# EAGLE board PCB_INKTIME (EAGLE 9.7.0)
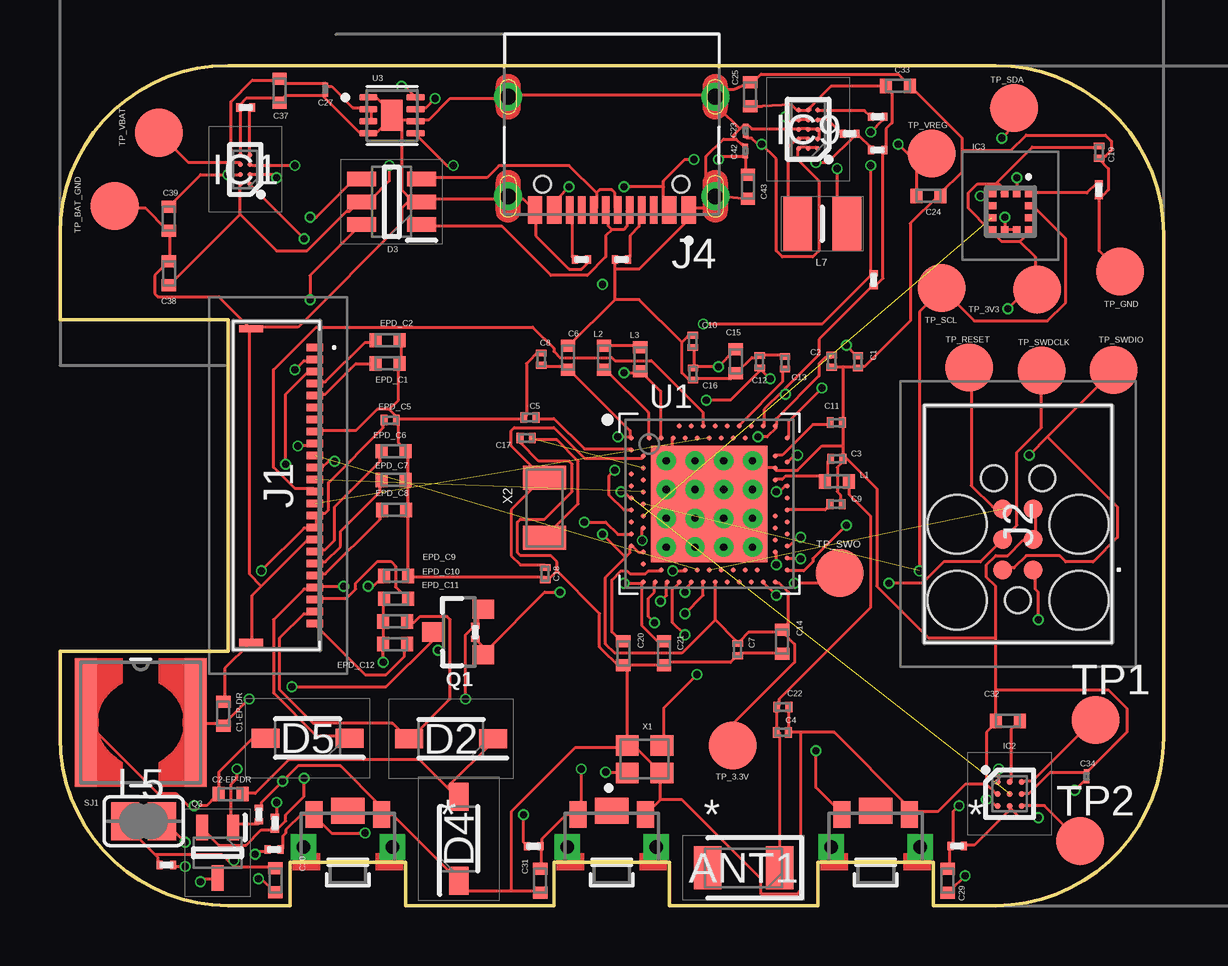
[diagram p0: board, top side]
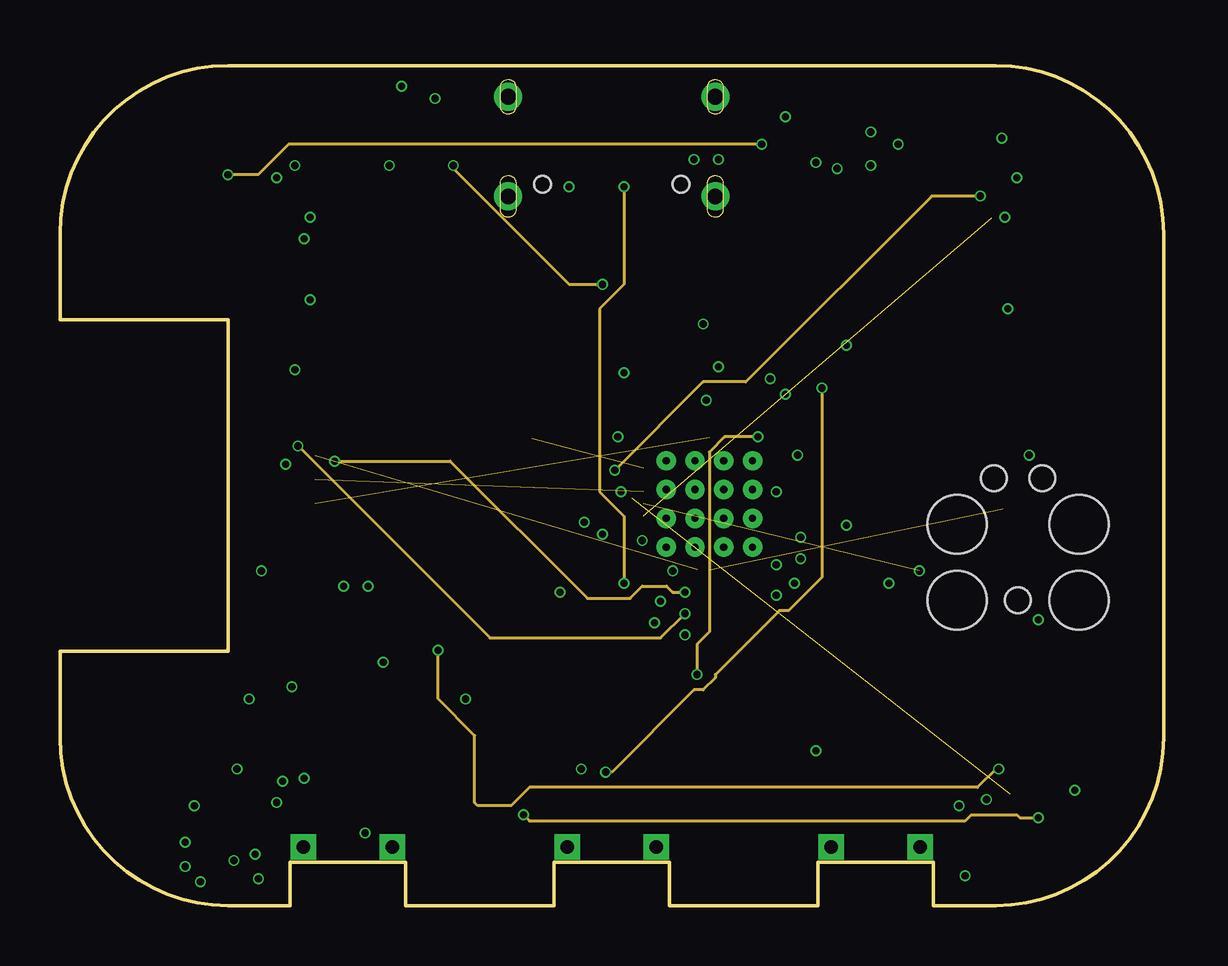
[diagram p1: board, inner layer Route15]
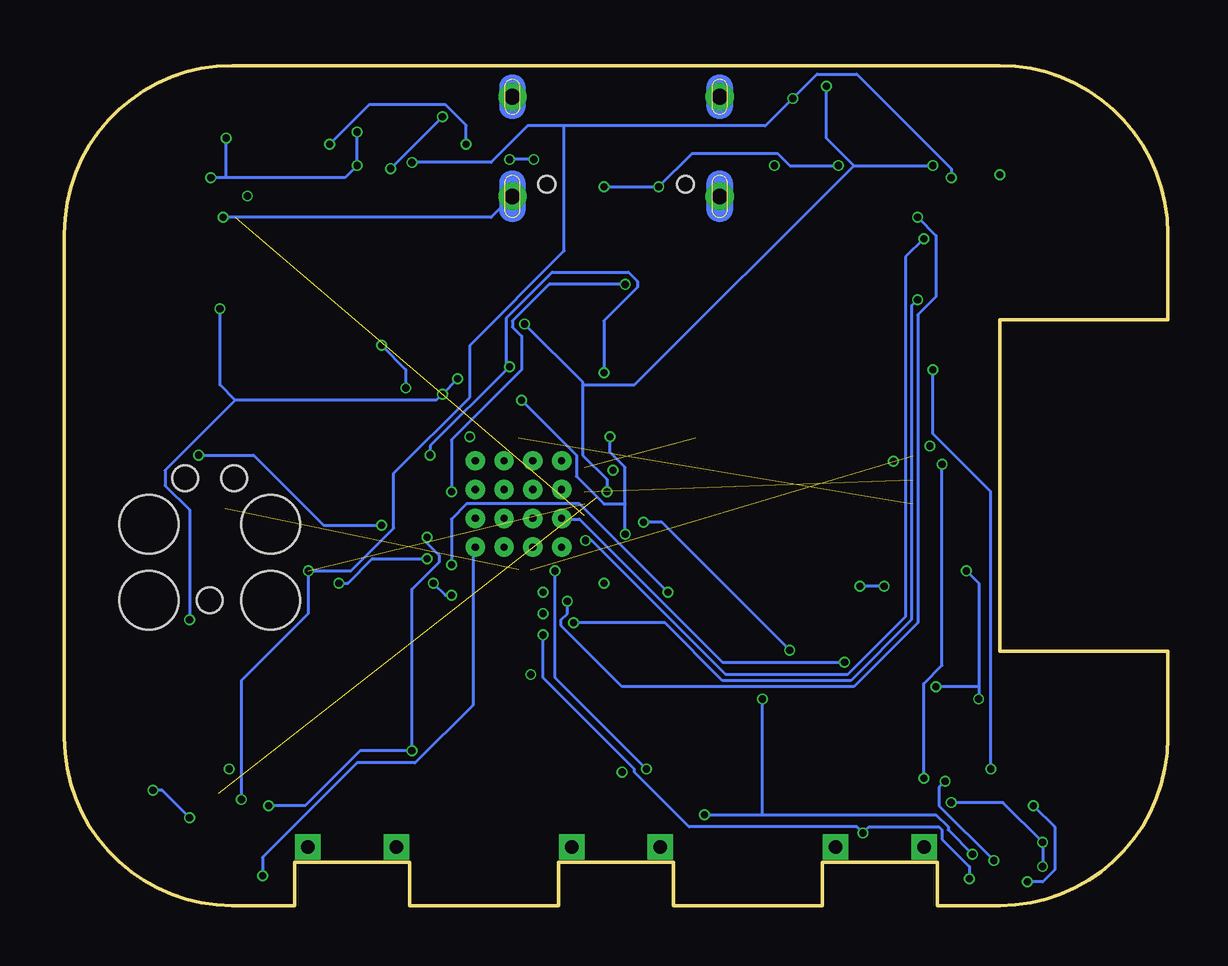
[diagram p2: board, bottom side, seen from below]

Size 46 x 35 mm. Coordinates in mm from the lower left corner, seen from the top.
Outline: 39,0 36.4,0 36.4,1.8 31.6,1.8 31.6,0 25.4,0 25.4,1.8 20.6,1.8 20.6,0 14.4,0 14.4,1.8 9.6,1.8 9.6,0 7,0 arc-90 0,7 0,10.6 7,10.6 7,24.4 0,24.4 0,28 arc-90 7,35 39,35 arc-90 46,28 46,7 arc-90 39,0
Copper layers (1+2*15+16): Top 0.035mm / dielectric 1.6mm / Route2 0.035mm / dielectric 0.15mm / Route15 0.035mm / dielectric 0.2mm / Bottom 0.035mm
Design rules "jlcpcb-2layers.dru *": minimum track width 5mil, minimum drill 0.2mm, track to track 5mil, track to pad 5mil, pad to pad 5mil, via to via 5mil, smd to smd 5mil, copper to edge 0.2mm, drill to drill 6mil, minimum pad ring 10mil, minimum via ring 3mil, stop-mask expansion 4mil, vias tented up to drill 999mm, thermal gap 10mil

## Footprints (pad centres in the part's own frame; a part is rotated, then mirrored left to right if it is on the bottom)
2450AT18B100E_ANTC3216X140N = smd 1.15 x 1.8: 1 -1.5,0; 2 1.5,0
NORDIC_NRF_3_RESC0201_L = smd 0.28 x 0.43: 1 -0.255,0; 2 0.255,0
NORDIC_NRF_3_RESC0402_L = smd 0.5 x 0.6: 1 -0.5,0; 2 0.5,0
GRM011R60J152KE01L_2_CAPC0201X13N = smd 0.22 x 0.23: 1 -0.185,0; 2 0.185,0
ESP32_C6_LIBRARY_5_SOD3716X135N = smd 1.15 x 0.8: 1 -1.75,0; 2 1.75,0
ESP32_C6_LIBRARY_3_SOT95P280X145-6N = smd 1.2 x 0.6: 1 -1.25,0.95; 2 -1.25,0; 3 -1.25,-0.95; 4 1.25,-0.95; 5 1.25,0; 6 1.25,0.95
BQ25180YBGR_BGA8C40P2X4_100X155X50 = smd 0.2 x 0.2: A1 -0.2,0.6; A2 0.2,0.6; B1 -0.2,0.2; B2 0.2,0.2; C1 -0.2,-0.2; C2 0.2,-0.2; D1 -0.2,-0.6; D2 0.2,-0.6
DRV2605YZFR_BGA9C50P3X3_144X144X62 = smd 0.25 x 0.25: A1 -0.5,0.5; A2 0,0.5; A3 0.5,0.5; B1 -0.5,0; B2 0,0; B3 0.5,0; C1 -0.5,-0.5; C2 0,-0.5; C3 0.5,-0.5
BMA423_BMA423 = smd 0.3 x 0.35: 1 -0.75,-0.775; 2 -0.25,-0.775; 3 0.25,-0.775; 4 0.75,-0.775; 7 0.75,0.775; 8 0.25,0.775; 9 -0.25,0.775; 10 -0.75,0.775 | smd 0.35 x 0.3: 5 0.775,-0.25; 6 0.775,0.25; 11 -0.775,0.25; 12 -0.775,-0.25
RT6160AWSC_BGA15C40P3X5_140X230X60 = smd 0.216 x 0.216: A1 -0.4,0.8; A2 0,0.8; A3 0.4,0.8; B1 -0.4,0.4; B2 0,0.4; B3 0.4,0.4; C1 -0.4,0; C2 0,0; C3 0.4,0; D1 -0.4,-0.4; D2 0,-0.4; D3 0.4,-0.4; E1 -0.4,-0.8; E2 0,-0.8; E3 0.4,-0.8
503480-2400_5034802400 = smd 0.3 x 0.7: 1 -5.75,1.525; 2 -5.25,1.525; 3 -4.75,1.525; 4 -4.25,1.525; 5 -3.75,1.525; 6 -3.25,1.525; 7 -2.75,1.525; 8 -2.25,1.525; 9 -1.75,1.525; 10 -1.25,1.525; 11 -0.75,1.525; 12 -0.25,1.525; 13 0.25,1.525; 14 0.75,1.525; 15 1.25,1.525; 16 1.75,1.525; 17 2.25,1.525; 18 2.75,1.525; 19 3.25,1.525; 20 3.75,1.525; 21 4.25,1.525; 22 4.75,1.525; 23 5.25,1.525; 24 5.75,1.525 | smd 0.3 x 1: MP1 -6.54,-1.125; MP2 6.54,-1.125
TC2030-IDC_TC2030IDC = smd 0.783 x 0.783: 1 -0.953,-0.635; 2 -0.953,0.635; 3 0.317,-0.635; 4 0.317,0.635; 5 1.588,-0.635; 6 1.588,0.635 | hole 2.451: -2.223,-2.54; -2.223,2.54; 0.952,-2.54; 0.952,2.54 | hole 1.067: -2.223,0; 2.857,-1.016; 2.857,1.016
KH-TYPE-C-16P_KINGHELM_KH-TYPE-C-16P = smd 0.6 x 1.15: A1_B12 -3.2,4.725; A4_B9 -2.4,4.725; A9_B4 2.4,4.725; A12_B1 3.2,4.725 | smd 0.3 x 1.15: A5 -1.25,4.725; A6 -0.25,4.725; A7 0.25,4.725; A8 1.25,4.725; B5 1.75,4.725; B6 0.75,4.725; B7 -0.75,4.725; B8 -1.75,4.725 | drill 0.65 pad 1.05: SH1 -4.32,0; SH2 4.32,0; SH3 -4.32,4.15; SH4 4.32,4.15 | hole 0.7: -2.89,3.65; 2.89,3.65
NORDIC_NRF_2_RESC0402_L = smd 0.5 x 0.6: 1 -0.5,0; 2 0.5,0
ESP32_C6_LIBRARY_2_IND_4828-WE-TPC_WRE = smd 0.9 x 5.3: 1 -2.286,0; 2 2.286,0
MLP2016SR47MT0S1_INDC2016X100N = smd 1.2 x 2.2: 1 -1.028,0; 2 1.028,0
ESP32_C6_LIBRARY_4_ESP32_C6_LIBRARY_4_ESP32_C6_LIBRARY_4_ESP32_C6_LIBRARY_4_ESP32_WROVER_SPARKFUN-DISCRETESEMI_SOT23-3 = smd 0.8 x 0.9: 1 -0.95,-1; 2 0.95,-1; 3 0,1.1
ESP32_C6_LIBRARY_6_SOT65P210X110-3N = smd 1.05 x 0.5: 1 -1.05,0.65; 2 -1.05,-0.65; 3 1.05,0
CPF0201D7K68C1_0201 = smd 0.35 x 0.25: 1 0,0.275; 2 0,-0.275
ESP32_C6_LIBRARY_7_JUMPER_SJ = smd 1.168 x 1.6: 1 -0.762,0; 2 0.762,0
2025-10-22_07-23-44_LIBRARY_SW_EVP-AKE31A_PAN = smd 0.711 x 1.092: 1 -1.4,-0.972; 2 1.4,-0.972 | drill 0.559 pad 0.914 square: 3 -1.848,0.381; 4 1.848,0.381 | smd 1.397 x 1.092: 5 0,-1.124
HECTOR_WATCH_1_TP20R = smd 2 x 2: TP 0,0
NORDIC_NRF_4_AQFN50P700X700X85_HS-74N = smd 4.85 x 4.85: P$74 0,0 | drill 0.3 pad 0.6: P$75 -1.8,1.8; P$76 -0.6,1.8; P$77 0.6,1.8; P$78 1.8,1.8; P$79 -1.8,0.6; P$80 -0.6,0.6; P$81 0.6,0.6; P$82 1.8,0.6; P$83 -1.8,-0.6; P$84 -0.6,-0.6; P$85 0.6,-0.6; P$86 1.8,-0.6; P$87 -1.8,-1.8; P$88 -0.6,-1.8; P$89 0.6,-1.8; P$90 1.8,-1.8 | smd 0.2 x 0.2: P$A8 -1.25,3.25; P$A10 -0.75,3.25; P$A12 -0.25,3.25; P$A14 0.25,3.25; P$A16 0.75,3.25; P$A18 1.25,3.25; P$A20 1.75,3.25; P$A22 2.25,3.25; P$A23 2.75,3.25; P$AA24 3.25,-2.25; P$AB2 -2.75,-2.5; P$AC5 -2,-2.75; P$AC9 -1,-2.75; P$AC11 -0.5,-2.75; P$AC13 0,-2.75; P$AC15 0.5,-2.75; P$AC17 1,-2.75; P$AC19 1.5,-2.75; P$AC21 2,-2.75; P$AC24 3.25,-2.75; P$AD2 -2.75,-3.25; P$AD4 -2.25,-3.25; P$AD6 -1.75,-3.25; P$AD8 -1.25,-3.25; P$AD10 -0.75,-3.25; P$AD12 -0.25,-3.25; P$AD14 0.25,-3.25; P$AD16 0.75,-3.25; P$AD18 1.25,-3.25; P$AD20 1.75,-3.25; P$AD22 2.25,-3.25; P$AD23 2.75,-3.25; P$B1 -3.25,2.75; P$B3 -2.5,2.75; P$B5 -2,2.75; P$B7 -1.5,2.75; P$B9 -1,2.75; P$B11 -0.5,2.75; P$B13 0,2.75; P$B15 0.5,2.75; P$B17 1,2.75; P$B19 1.5,2.75; P$B24 3.25,2.75; P$C1 -3.25,2.25; P$D2 -2.75,2; P$D23 2.75,2; P$E24 3.25,1.75; P$F2 -2.75,1.5; P$F23 2.75,1.5; P$G1 -3.25,1.25; P$H2 -2.75,1; P$H23 2.75,1; P$J1 -3.25,0.75; P$J24 3.25,0.75; P$K2 -2.75,0.5; P$L1 -3.25,0.25; P$L24 3.25,0.25; P$M2 -2.75,0; P$N1 -3.25,-0.25; P$N24 3.25,-0.25; P$P2 -2.75,-0.5; P$P23 2.75,-0.5; P$R1 -3.25,-0.75; P$R24 3.25,-0.75; P$T2 -2.75,-1; P$T23 2.75,-1; P$U1 -3.25,-1.25; P$U24 3.25,-1.25; P$V23 2.75,-1.5; P$W1 -3.25,-1.75; P$W24 3.25,-1.75; P$Y2 -2.75,-2; P$Y23 2.75,-2
ESP32_C6_LIBRARY_SON50P200X200X80-9N = smd 0.76 x 0.27: 1 -0.985,0.75; 2 -0.985,0.25; 3 -0.985,-0.25; 4 -0.985,-0.75; 5 0.985,-0.75; 6 0.985,-0.25; 7 0.985,0.25; 8 0.985,0.75 | smd 0.9 x 1.3: 9 0,0
NORDIC_NRF_BT-XTAL_2016_N = smd 0.95 x 0.85: 1 -0.725,-0.575; 2 0.725,-0.575; 3 0.725,0.575; 4 -0.725,0.575
NORDIC_NRF_1_XTAL_3215_N = smd 1 x 1.8: 1 -1.25,0; 2 1.25,0

## Placement (x,y rotation side)
ANT1  2450AT18B100E  [2450AT18B100E_ANTC3216X140N]  28.49,1.57 180 top
C1  12pF  [NORDIC_NRF_3_RESC0201_L]  33.26,22.66 270 top
C1-EP-DR  10uF  [NORDIC_NRF_3_RESC0402_L]  6.8,8 90 top
C2  12pF  [NORDIC_NRF_3_RESC0201_L]  32.16,22.68 270 top
C2-EP-DR  4.7uF/25V  [NORDIC_NRF_3_RESC0402_L]  7.11,4.65 180 top
C3  1pF  [NORDIC_NRF_3_RESC0201_L]  32.38,18.62 0 top
C4  1pF  [NORDIC_NRF_3_RESC0201_L]  30.11,7.22 0 top
C5  100nF  [NORDIC_NRF_3_RESC0201_L]  19.59,20.34 180 top
C6  4.7µF  [NORDIC_NRF_3_RESC0402_L]  21.18,22.84 90 top
C7  100nF  [NORDIC_NRF_3_RESC0201_L]  28.24,10.66 270 top
C8  100nF  [NORDIC_NRF_3_RESC0201_L]  20.06,22.77 90 top
C9  820pF  [NORDIC_NRF_3_RESC0201_L]  32.35,16.72 0 top
C10  N.C.  [NORDIC_NRF_3_RESC0201_L]  26.37,23.51 90 top
C11  100pF  [NORDIC_NRF_3_RESC0201_L]  32.36,20.12 0 top
C12  100nF  [NORDIC_NRF_3_RESC0201_L]  29.16,22.66 90 top
C13  N.C.  [NORDIC_NRF_3_RESC0201_L]  30.22,22.62 90 top
C14  4.7µF  [NORDIC_NRF_3_RESC0402_L]  30.1,10.99 270 top
C15  1.0µF  [NORDIC_NRF_3_RESC0402_L]  28.17,22.69 270 top
C16  47nF  [NORDIC_NRF_3_RESC0201_L]  26.39,22.15 270 top
C17  12pF  [NORDIC_NRF_3_RESC0201_L]  19.43,19.48 0 top
C18  12pF  [NORDIC_NRF_3_RESC0201_L]  20.22,13.83 90 top
C19  100nF  [NORDIC_NRF_3_RESC0201_L]  43.31,31.39 270 top
C20  4.7µF  [NORDIC_NRF_3_RESC0402_L]  23.48,10.5 270 top
C21  4.7µF  [NORDIC_NRF_3_RESC0402_L]  25.18,10.51 270 top
C22  N.C.  [NORDIC_NRF_3_RESC0201_L]  30.13,8.28 0 top
C23  0.1uF  [GRM011R60J152KE01L_2_CAPC0201X13N]  28.58,32.28 270 top
C24  10uF  [NORDIC_NRF_3_RESC0402_L]  36.19,29.57 180 top
C25  22uF  [NORDIC_NRF_3_RESC0402_L]  28.76,33.81 90 top
C27  0.1uF  [GRM011R60J152KE01L_2_CAPC0201X13N]  11.05,34 90 top
C29  1uF  [NORDIC_NRF_3_RESC0402_L]  36.99,1.03 90 top
C30  1uF  [NORDIC_NRF_3_RESC0402_L]  8.98,1.05 270 top
C31  1uF  [NORDIC_NRF_3_RESC0402_L]  20.02,1.03 90 top
C32  1uF  [NORDIC_NRF_3_RESC0402_L]  39.52,7.7 0 top
C33  22uF  [NORDIC_NRF_3_RESC0402_L]  34.92,34.15 0 top
C34  0.1uF  [GRM011R60J152KE01L_2_CAPC0201X13N]  42.8,5.38 270 top
C37  1uF  [NORDIC_NRF_3_RESC0402_L]  9.16,33.94 270 top
C38  1uF  [NORDIC_NRF_3_RESC0402_L]  4.54,26.34 90 top
C39  10uF  [NORDIC_NRF_3_RESC0402_L]  4.54,28.63 270 top
C42  0.1uF  [GRM011R60J152KE01L_2_CAPC0201X13N]  28.56,31.44 90 top
C43  4.7uF  [NORDIC_NRF_3_RESC0402_L]  28.68,29.94 270 top
D2  MBR0530  [ESP32_C6_LIBRARY_5_SOD3716X135N]  16.3,6.95 180 top
D3  ESP32_C6_LIBRARY_3_USBLC6-2SC6Y  [ESP32_C6_LIBRARY_3_SOT95P280X145-6N]  13.83,29.32 180 top
D4  MBR0530  [ESP32_C6_LIBRARY_5_SOD3716X135N]  16.62,2.78 90 top
D5  MBR0530  [ESP32_C6_LIBRARY_5_SOD3716X135N]  10.32,6.98 180 top
EPD_C1  1uF/50V  [NORDIC_NRF_3_RESC0402_L]  13.66,22.59 180 top
EPD_C2  1uF/50V  [NORDIC_NRF_3_RESC0402_L]  13.65,23.55 180 top
EPD_C5  0.1uF/50V  [NORDIC_NRF_3_RESC0201_L]  13.77,20.23 180 top
EPD_C6  1uF/50V  [NORDIC_NRF_3_RESC0402_L]  13.91,18.93 180 top
EPD_C7  1uF/50V  [NORDIC_NRF_3_RESC0402_L]  13.91,17.74 180 top
EPD_C8  1uF/50V  [NORDIC_NRF_3_RESC0402_L]  13.93,16.49 180 top
EPD_C9  1uF/50V  [NORDIC_NRF_3_RESC0402_L]  14.01,13.73 180 top
EPD_C10  1uF/50V  [NORDIC_NRF_3_RESC0402_L]  14.01,12.78 0 top
EPD_C11  1uF/50V  [NORDIC_NRF_3_RESC0402_L]  13.98,11.84 0 top
EPD_C12  1uF/50V  [NORDIC_NRF_3_RESC0402_L]  13.97,10.89 0 top
IC1  BQ25180YBGR  [BQ25180YBGR_BGA8C40P2X4_100X155X50]  7.72,30.67 180 top
IC2  DRV2605YZFR  [DRV2605YZFR_BGA9C50P3X3_144X144X62]  39.59,4.66 0 top
IC3  BMA421  [BMA423_BMA423]  39.62,28.91 180 top
IC9  RT6160AWSC  [RT6160AWSC_BGA15C40P3X5_140X230X60]  31.18,32.34 180 top
J1  503480-2400  [503480-2400_5034802400]  9.1,17.5 270 top
J2  TC2030-IDC  [TC2030-IDC_TC2030IDC]  39.94,14.94 90 top
J4  KH-TYPE-C-16P_KH-TYPE-C-16P  [KH-TYPE-C-16P_KINGHELM_KH-TYPE-C-16P]  23,33.7 180 top
L1  3.9nH  [NORDIC_NRF_2_RESC0402_L]  32.38,17.68 0 top
L2  10µH  [NORDIC_NRF_2_RESC0402_L]  22.68,22.83 90 top
L3  15nH  [NORDIC_NRF_2_RESC0402_L]  24.2,22.76 270 top
L5  68uH  [ESP32_C6_LIBRARY_2_IND_4828-WE-TPC_WRE]  3.37,7.63 0 top
L7  FTC252012SR47MBCA  [MLP2016SR47MT0S1_INDC2016X100N]  31.78,28.41 0 top
Q1  20V/4.2A/52mΩ/1.4W  [ESP32_C6_LIBRARY_4_ESP32_C6_LIBRARY_4_ESP32_C6_LIBRARY_4_ESP32_C6_LIBRARY_4_ESP32_WROVER_SPARKFUN-DISCRETESEMI_SOT23-3]  16.65,11.4 90 top
Q3  SI1308EDL-T1-GE3  [ESP32_C6_LIBRARY_6_SOT65P210X110-3N]  6.57,2.2 270 top
R1-EP-DR  0.47  [CPF0201D7K68C1_0201]  8.97,3.43 0 top
R1_USB  5K1  [CPF0201D7K68C1_0201]  23.4,26.92 90 top
R2  0  [CPF0201D7K68C1_0201]  34.08,32.87 270 top
R2-EP-DR  10K  [CPF0201D7K68C1_0201]  8.3,3.8 0 top
R2_USB  5K1  [CPF0201D7K68C1_0201]  21.73,26.92 90 top
R3  0  [CPF0201D7K68C1_0201]  43.3,29.83 180 top
R4  0  [CPF0201D7K68C1_0201]  32.92,32.16 270 top
R5  10k  [CPF0201D7K68C1_0201]  8.93,2.34 270 top
R7  10k  [CPF0201D7K68C1_0201]  37.4,2.48 90 top
R8  10k  [CPF0201D7K68C1_0201]  19.75,2.47 270 top
R9  10K  [CPF0201D7K68C1_0201]  7.74,33.25 90 top
R17  3K3  [CPF0201D7K68C1_0201]  34.08,31.49 270 top
R18  3K3  [CPF0201D7K68C1_0201]  33.92,26.07 180 top
R_PWR_EPD  10K  [CPF0201D7K68C1_0201]  17.32,11.38 180 top
R_TYPE_SEL  2.2  [CPF0201D7K68C1_0201]  4.44,1.69 90 top
SJ1  [ESP32_C6_LIBRARY_7_JUMPER_SJ]  3.49,3.52 0 top
SW_DN  2025-10-22_07-23-44_LIBRARY_EVP-AKE31ASW_EVP-AKE31A_PAN  [2025-10-22_07-23-44_LIBRARY_SW_EVP-AKE31A_PAN]  34,2.83 180 top
SW_ENT  2025-10-22_07-23-44_LIBRARY_EVP-AKE31ASW_EVP-AKE31A_PAN  [2025-10-22_07-23-44_LIBRARY_SW_EVP-AKE31A_PAN]  23,2.83 180 top
SW_UP  2025-10-22_07-23-44_LIBRARY_EVP-AKE31ASW_EVP-AKE31A_PAN  [2025-10-22_07-23-44_LIBRARY_SW_EVP-AKE31A_PAN]  12,2.83 180 top
TP1  HECTOR_WATCH_1_TPTP20R  [HECTOR_WATCH_1_TP20R]  43.16,7.73 0 top
TP2  HECTOR_WATCH_1_TPTP20R  [HECTOR_WATCH_1_TP20R]  42.52,2.69 0 top
TP_3.3V  HECTOR_WATCH_1_TPTP20R  [HECTOR_WATCH_1_TP20R]  28.04,6.67 0 top
TP_3V3  HECTOR_WATCH_1_TPTP20R  [HECTOR_WATCH_1_TP20R]  40.73,25.66 0 top
TP_BAT_GND  HECTOR_WATCH_1_TPTP20R  [HECTOR_WATCH_1_TP20R]  2.28,29.16 0 top
TP_GND  HECTOR_WATCH_1_TPTP20R  [HECTOR_WATCH_1_TP20R]  44.18,26.41 0 top
TP_RESET  HECTOR_WATCH_1_TPTP20R  [HECTOR_WATCH_1_TP20R]  37.9,22.41 0 top
TP_SCL  HECTOR_WATCH_1_TPTP20R  [HECTOR_WATCH_1_TP20R]  36.76,25.74 0 top
TP_SDA  HECTOR_WATCH_1_TPTP20R  [HECTOR_WATCH_1_TP20R]  39.77,33.23 0 top
TP_SWDCLK  HECTOR_WATCH_1_TPTP20R  [HECTOR_WATCH_1_TP20R]  40.92,22.3 0 top
TP_SWDIO  HECTOR_WATCH_1_TPTP20R  [HECTOR_WATCH_1_TP20R]  43.91,22.31 0 top
TP_SWO  HECTOR_WATCH_1_TPTP20R  [HECTOR_WATCH_1_TP20R]  32.51,13.85 0 top
TP_VBAT  HECTOR_WATCH_1_TPTP20R  [HECTOR_WATCH_1_TP20R]  4.12,32.2 0 top
TP_VREG  HECTOR_WATCH_1_TPTP20R  [HECTOR_WATCH_1_TP20R]  36.33,31.34 0 top
U1  NRF52840_QF  [NORDIC_NRF_4_AQFN50P700X700X85_HS-74N]  27.07,16.73 0 top
U3  MAX17048G+T10  [ESP32_C6_LIBRARY_SON50P200X200X80-9N]  13.84,32.93 0 top
X1  32MHZ  [NORDIC_NRF_BT-XTAL_2016_N]  24.37,6.1 0 top
X2  32.768kHz  [NORDIC_NRF_1_XTAL_3215_N]  20.19,16.57 90 top

## Library data of the parts
ANT1 = InkTime_v5; ARROW_PART_NUMBER: 2450AT18B100E; ARROW_PRICE-STOCK: https://www.arrow.com/en/products/2450at18b100e/johanson-dielectrics?utm_currency=USD&region=nac; DESCRIPTION: Antennas 2.45GHz ANTENNA; HEIGHT: 1.4mm; MANUFACTURER_NAME: JOHANSON TECHNOLOGY; MANUFACTURER_PART_NUMBER: 2450AT18B100E; MOUSER_PART_NUMBER: 609-2450AT18B100E; MOUSER_PRICE-STOCK: https://www.mouser.co.uk/ProductDetail/Johanson-Technology/2450AT18B100E?qs=yCnrNFeXz%252Bh5MFsFIXGZGA%3D%3D
C1 C1-EP-DR C2 C2-EP-DR C3-C22 C24 C25 C29-C33 C37-C39 C43 EPD_C1 EPD_C2 EPD_C5-EPD_C12 L1-L3 R1-EP-DR R1_USB R2 R2-EP-DR R2_USB R3-R5 R7-R9 R17 R18 R_PWR_EPD R_TYPE_SEL SJ1 TP1 TP2 TP_3.3V TP_3V3 TP_BAT_GND TP_GND TP_RESET TP_SCL TP_SDA TP_SWDCLK TP_SWDIO TP_SWO TP_VBAT TP_VREG U1 X1 X2 = InkTime_v5
C23 C27 C34 C42 = InkTime_v5; AVAILABILITY: In Stock; CHECK_PRICES: https://www.snapeda.com/parts/GRM011R60J152KE01L/Murata/view-part/?ref=eda; DESCRIPTION: SMD Capacitor X5R(EIA) with Capacitance: 1500pF Tol. 10%. Rated Voltage: 6.3Vdc; MF: Murata; MP: GRM011R60J152KE01L; PACKAGE: 0201 Murata; PRICE: None; SNAPEDA_LINK: https://www.snapeda.com/parts/GRM011R60J152KE01L/Murata/view-part/?ref=snap
D2 D4 D5 = InkTime_v5; AVAILABILITY: In Stock; CHECK_PRICES: https://www.snapeda.com/parts/MBR0530/Onsemi/view-part/?ref=eda; DESCRIPTION: Diode Schottky 30 V 500mA Surface Mount SOD-123; MF: ON Semiconductor; MP: MBR0530; PACKAGE: SOD-123-2 ON Semiconductor; PRICE: None; PURCHASE-URL: https://www.snapeda.com/api/url_track_click_mouser/?unipart_id=179458&manufacturer=ON Semiconductor&part_name=MBR0530&search_term=None; SNAPEDA_LINK: https://www.snapeda.com/parts/MBR0530/Onsemi/view-part/?ref=snap
D3 = InkTime_v5; AVAILABILITY: In Stock; CHECK_PRICES: https://www.snapeda.com/parts/USBLC6-2SC6Y/STMicroelectronics/view-part/?ref=eda; DESCRIPTION: 17V Clamp 5A (8/20µs) Ipp Tvs Diode Surface Mount SOT-23-6; MF: STMicroelectronics; MP: USBLC6-2SC6Y; PACKAGE: SOT-23-6 STMicroelectronics; PRICE: None; SNAPEDA_LINK: https://www.snapeda.com/parts/USBLC6-2SC6Y/STMicroelectronics/view-part/?ref=snap
IC1 = InkTime_v5; ARROW_PART_NUMBER: BQ25180YBGR; ARROW_PRICE-STOCK: https://www.arrow.com/en/products/bq25180ybgr/texas-instruments?utm_currency=USD&region=nac; DESCRIPTION: Charger IC Lithium Ion/Polymer, Lithium Iron Phosphate 8-DSBGA (1.6x1.1); HEIGHT: 0.5mm; MANUFACTURER_NAME: Texas Instruments; MANUFACTURER_PART_NUMBER: BQ25180YBGR; MOUSER_PART_NUMBER: 595-BQ25180YBGR; MOUSER_PRICE-STOCK: https://www.mouser.co.uk/ProductDetail/Texas-Instruments/BQ25180YBGR?qs=doiCPypUmgEWjAK%252BJAX6Tw%3D%3D
IC2 = InkTime_v5; ARROW_PART_NUMBER: DRV2605YZFR; ARROW_PRICE-STOCK: https://www.arrow.com/en/products/drv2605yzfr/texas-instruments?region=nac; DESCRIPTION: Haptic Driver for ERM/LRA with Built-In Library and Smart Loop Architecture; HEIGHT: 0.625mm; MANUFACTURER_NAME: Texas Instruments; MANUFACTURER_PART_NUMBER: DRV2605YZFR
IC3 = InkTime_v5; ARROW_PART_NUMBER: BMA423; ARROW_PRICE-STOCK: https://www.arrow.com/en/products/bma423/bosch; DESCRIPTION: Accelerometers Triaxial low-g 12bit Acceleration Sensor; HEIGHT: 1mm; MANUFACTURER_NAME: BOSCH; MANUFACTURER_PART_NUMBER: BMA423; MOUSER_PART_NUMBER: 262-BMA423; MOUSER_PRICE-STOCK: https://www.mouser.co.uk/ProductDetail/Bosch-Sensortec/BMA423?qs=HXFqYaX1Q2xC%252BSgeGoX3mg%3D%3D
IC9 = InkTime_v5; DESCRIPTION: Buck-Boost Regulator Positive Output Step-Up/Step-Down I2C DC-DC Controller IC 15-WL-CSP (BSC) (1.4x2.3); HEIGHT: 0.6mm; MANUFACTURER_NAME: RICHTEK; MANUFACTURER_PART_NUMBER: RT6160AWSC; MOUSER_PART_NUMBER: 835-RT6160AWSC; MOUSER_PRICE-STOCK: https://www.mouser.co.uk/ProductDetail/Richtek/RT6160AWSC?qs=amGC7iS6iy%2FLd9PSoixZXQ%3D%3D
J1 = InkTime_v5; DESCRIPTION: FFC & FPC Connectors 0.5mm FPC RA SMT Dual Contact 24Ckt; HEIGHT: 1.87mm; MANUFACTURER_NAME: Molex; MANUFACTURER_PART_NUMBER: 503480-2400; MOUSER_PART_NUMBER: 538-503480-2400; MOUSER_PRICE-STOCK: https://www.mouser.co.uk/ProductDetail/Molex/503480-2400?qs=OAhjpuo3Vu7efIoxFh9AOw%3D%3D
J2 = InkTime_v5; DESCRIPTION: CABLE ADAPTER 6 POS; HEIGHT: 19mm; MANUFACTURER_NAME: Tag Connect; MANUFACTURER_PART_NUMBER: TC2030-IDC
J4 = InkTime_v5; AVAILABILITY: Not in stock; CHECK_PRICES: https://www.snapeda.com/parts/KH-TYPE-C-16P/Kinghelm/view-part/?ref=eda; MF: kinghelm; MP: KH-TYPE-C-16P; PACKAGE: None; PRICE: None; SNAPEDA_LINK: https://www.snapeda.com/parts/KH-TYPE-C-16P/Kinghelm/view-part/?ref=snap
L5 = InkTime_v5; COPYRIGHT: Copyright (C) 2024 Ultra Librarian. All rights reserved.; MANUFACTURER_PART_NUMBER: 744043680; MFR_NAME: Wurth Electronics
L7 = InkTime_v5; DESCRIPTION: SMD / SMT Inductors (Coils), L=0.47?H, L x W x T :; HEIGHT: 1mm; JLCPCB: https://jlcpcb.com/partdetail/6763488-FTC252012SR47MBCA/C5832368; MANUFACTURER_NAME: TDK; MANUFACTURER_PART_NUMBER: FTC252012SR47MBCA
Q1 = InkTime_v5; PROD_ID: TRAN-14388
Q3 = InkTime_v5; AVAILABILITY: In Stock; CHECK_PRICES: https://www.snapeda.com/parts/SI1308EDL-T1-GE3/Vishay+Siliconix/view-part/?ref=eda; DESCRIPTION: Si1308EDL-T1-GE3 N-channel MOSFET Transistor, 1.5 A, 30 V, 3-Pin SC-70 | Siliconix / Vishay SI1308EDL-T1-GE3; MF: Vishay Siliconix; MP: SI1308EDL-T1-GE3; PACKAGE: SOT-323 Vishay Semiconductor; PRICE: None; PURCHASE-URL: https://www.snapeda.com/api/url_track_click_mouser/?unipart_id=274603&manufacturer=Vishay Siliconix&part_name=SI1308EDL-T1-GE3&search_term=None; SNAPEDA_LINK: https://www.snapeda.com/parts/SI1308EDL-T1-GE3/Vishay+Siliconix/view-part/?ref=snap
SW_DN SW_ENT SW_UP = InkTime_v5; COPYRIGHT: Copyright (C) 2025 Ultra Librarian. All rights reserved.; DIGI-KEY_PART_NUMBER_1: P123437TR-ND; DIGI-KEY_PART_NUMBER_2: P123437CT-ND; DIGI-KEY_PART_NUMBER_3: P123437DKR-ND; MANUFACTURER_NAME: Panasonic; MANUFACTURER_PART_NUMBER: EVP-AKE31A
U3 = InkTime_v5; AVAILABILITY: In Stock; CHECK_PRICES: https://www.snapeda.com/parts/MAX17048G+T10/Analog+Devices/view-part/?ref=eda; DESCRIPTION: 3µA 1-Cell/2-Cell Fuel Gauge with ModelGauge; MF: Analog Devices; MP: MAX17048G+T10; PACKAGE: TDFN-8 Maxim; PRICE: None; PURCHASE-URL: https://www.snapeda.com/api/url_track_click_mouser/?unipart_id=329239&manufacturer=Analog Devices&part_name=MAX17048G+T10&search_term=None; SNAPEDA_LINK: https://www.snapeda.com/parts/MAX17048G+T10/Analog+Devices/view-part/?ref=snap

## Nets
3V3/1.7D: C34.2 IC2.C2 Q1.2 R5.2 R7.2 R8.2 R_PWR_EPD.2
3V3/2.4A: C6.1 C7.1 C8.1 C12.1 C14.1 C19.1 C25.1 C33.1 IC3.3 IC3.7 IC3.10 IC9.E2 IC9.E3 J2.1 R17.1 R18.1 TP_3.3V.TP TP_3V3.TP U1.P$A22 U1.P$AD14 U1.P$AD23 U1.P$B1 U1.P$W1 U1.P$Y2
ALERT: U1.P$J24 U3.5
D+: D3.4 U1.P$AD6
D-: D3.6 U1.P$AD4
DEC1: C5.1 U1.P$C1
DEC3: C11.1 U1.P$D23
DEC4_6: C10.1 C15.1 C16.1 L3.2 U1.P$B5 U1.P$E24
DN: D3.1 J4.A7 J4.B7
DP: D3.3 J4.A6 J4.B6
EPD_3V3: C1-EP-DR.1 EPD_C5.2 J1.15 J1.16 L5.2 Q1.3
EPD_BUSY: J1.9 U1.P$AD12
EPD_CS: J1.12 U1.P$K2
EPD_DC: J1.11 U1.P$AD10
EPD_RST: J1.10 U1.P$AC11
GDR: J1.2 Q3.1 R2-EP-DR.2
GND: C1-EP-DR.2 C1.2 C2.2 C3.2 C4.2 C5.2 C6.2 C7.2 C8.2 C9.2 C10.2 C11.2 C12.2 C13.2 C14.2 C15.2 C16.2 C17.1 C18.1 C19.2 C20.2 C21.2 C22.2 C23.1 C24.1 C25.2 C27.1 C29.1 C30.1 C31.1 C32.1 C33.2 C34.1 C37.2 C38.2 C39.2 C42.2 C43.2 D3.2 D4.1 EPD_C1.1 EPD_C2.1 EPD_C5.1 EPD_C6.1 EPD_C7.1 EPD_C8.1 EPD_C9.1 EPD_C10.1 EPD_C11.1 EPD_C12.1 IC1.D2 IC2.B1 IC2.B3 IC3.8 IC3.9 IC9.B1 IC9.C1 IC9.C2 IC9.C3 J1.8 J1.17 J1.MP1 J1.MP2 J2.3 J2.5 J4.A1_B12 J4.A12_B1 J4.SH1 J4.SH2 J4.SH3 J4.SH4 R1_USB.1 R2-EP-DR.1 R2_USB.2 R3.1 R9.1 R_TYPE_SEL.1 SJ1.1 SW_DN.1 SW_ENT.1 SW_UP.1 TP_BAT_GND.TP TP_GND.TP U1.P$74 U1.P$75 U1.P$76 U1.P$77 U1.P$78 U1.P$79 U1.P$80 U1.P$81 U1.P$82 U1.P$83 U1.P$84 U1.P$85 U1.P$86 U1.P$87 U1.P$88 U1.P$89 U1.P$90 U1.P$B7 U1.P$F23 U3.1 U3.4 U3.6 U3.9 X1.2 X1.4
HAPTIC_EN: IC2.A1 U1.P$U1
IMU_INT1: IC3.5 U1.P$N1
IMU_INT2: IC3.6 U1.P$P2
LX1: IC9.B2 IC9.B3 L7.1
LX2: IC9.D2 IC9.D3 L7.2
MOSI: J1.14 U1.P$B13
N$1: IC1.D1 R9.2
N$2: C18.2 U1.P$D2 X2.2
N$3: C1.1 U1.P$B24 X1.1
N$4: C2.1 U1.P$A23 X1.3
N$5: C17.2 U1.P$F2 X2.1
N$6: L2.2 L3.1
N$7: L2.1 U1.P$B3
N$8: C9.1 U1.P$N24
N$9: C13.1 U1.P$A18
N$10: C3.1 L1.1 U1.P$H23
N$11: C20.1 U1.P$AC5
N$12: C32.2 IC2.A2
N$13: IC3.1 R3.2
N$14: C2-EP-DR.2 D5.2 L5.1 Q3.3
N$15: C2-EP-DR.1 D2.1 D4.2
N$16: IC9.E1 R2.2
N$17: J4.A5 R1_USB.2
N$18: IC9.D1 R4.2
N$20: EPD_C2.2 J1.4
N$22: R1-EP-DR.1 R_TYPE_SEL.2 SJ1.2
N$23: EPD_C1.2 J1.5
N$24: J4.B5 R2_USB.1
N$29: EPD_C6.2 J1.18
N$31: EPD_C7.2 J1.19
N$32: EPD_C8.2 J1.20
N$34: EPD_C10.2 J1.22
N$36: EPD_C12.2 J1.24
OUT+: IC2.A3 TP1.TP
OUT-: IC2.C3 TP2.TP
P0.04: U1.P$J1
P0.09: U1.P$L24
P0.13: C30.2 R5.1 SW_UP.2 U1.P$AD8
P0.14: C31.2 R8.1 SW_ENT.2 U1.P$AC9
P0.19: U1.P$AC15
P0.20: U1.P$AD16
P0.21: U1.P$AC17
P0.22: U1.P$AD18
P0.23: U1.P$AC19
P0.24: U1.P$AD20
P0.25: U1.P$AC21
P0.26: U1.P$G1
P0.27: U1.P$H2
P0.28: U1.P$B11
P0.29: U1.P$A10
P0.30: U1.P$B9
P0.31: U1.P$A8
P1.01: Q1.1 R_PWR_EPD.1 U1.P$Y23
P1.02: C29.2 R7.1 SW_DN.2 U1.P$W24
P1.03: U1.P$V23
P1.04: U1.P$U24
P1.05: U1.P$T23
P1.06: U1.P$R24
P1.07: U1.P$P23
P1.09: U1.P$R1
P1.10: U1.P$A20
P1.11: U1.P$B19
P1.12: U1.P$B17
P1.13: U1.P$A16
P1.14: U1.P$B15
P1.15: U1.P$A14
PMIC_INT: IC1.A1 U1.P$T2
PREVGH: D5.1 EPD_C9.2 J1.21
PREVGL: D2.2 EPD_C11.2 J1.23
RESE: J1.3 Q3.2 R1-EP-DR.2
RESET: J2.6 TP_RESET.TP U1.P$AC13
RF: ANT1.1 C4.1 C22.1 L1.2
SCK: J1.13 U1.P$A12
SCL: IC1.B1 IC2.C1 IC3.12 R4.1 R17.2 TP_SCL.TP U1.P$M2 U3.7
SDA: IC1.C1 IC2.B2 IC3.2 R2.1 R18.2 TP_SDA.TP U1.P$L1 U3.8
SWDCLK: J2.4 TP_SWDCLK.TP U1.P$AA24
SWDIO: J2.2 TP_SWDIO.TP U1.P$AC24
SWO: TP_SWO.TP U1.P$AD22
VBAT: C27.2 C37.1 IC1.C2 TP_VBAT.TP U3.2 U3.3
VBUS: C21.1 C38.1 C42.1 C43.1 D3.5 IC1.A2 J4.A4_B9 J4.A9_B4 U1.P$AD2
VREG: C23.2 C24.2 C39.1 IC1.B2 IC9.A1 IC9.A2 IC9.A3 TP_VREG.TP

## Tracks (layer width: path | path; a pad name or v marks a point on that pad's centre or on a via)
3V3/1.7D  (via drill 0.3)
  Top 0.127: v42.3,4.8 42.69,5.18 C34.2 | v40.78,3.66 40.02,3.66 39.64,4.04 | 39.64,4.04 38.11,2.51 37.73,2.51 R7.2 | 39.64,4.04 IC2.C2 | Q1.2 17.54,12.29 17.41,12.17 17.41,11.66 R_PWR_EPD.2 17.29,11.66 16.9,11.28 v16.9,8.61 | v8.14,2.13 8.27,2.26 8.65,2.26 R5.2 | v19.32,3.78 19.32,2.64 19.44,2.51 R8.2
  Route15 0.127: v40.78,3.66 40.02,3.66 39.89,3.78 37.99,3.78 37.73,3.53 19.57,3.53 v19.32,3.78
  Bottom 0.127: v42.3,4.8 41.92,4.8 v40.78,3.66 | v8.14,2.13 9.16,3.15 9.16,3.28 9.66,3.78 16.9,3.78 | v19.32,3.78 16.9,3.78 | 16.9,3.78 v16.9,8.61
3V3/2.4A  (via drill 0.3)
  Top 0.127: 23.76,19.53 23.76,19.79 21.22,22.33 C6.1 21.09,22.45 20.08,22.45 C8.1 | U1.P$AD23 29.86,13.44 29.98,13.44 30.37,13.05 30.37,11.79 30.11,11.53 C14.1 | U1.P$Y2 24.27,14.71 24.14,14.71 23.89,14.96 U1.P$W1 23.76,14.96 23.76,14.71 23.64,14.58 | 27.32,11.91 27.32,13.44 U1.P$AD14 | 27.32,11.91 28.21,11.02 C7.1 28.33,11.02 28.71,11.4 29.98,11.4 C14.1 | 23.64,14.58 22.75,13.69 22.75,10.9 23.13,10.52 25.92,10.52 27.32,11.91 | TP_3.3V.TP 28.08,6.71 28.08,7.59 30.62,10.13 30.62,10.9 30.11,11.4 C14.1 | v23.25,19.53 23.76,19.53 | v22.62,15.47 23.51,14.58 23.64,14.58 | 23.76,19.53 U1.P$B1 | 40.02,27.66 39.26,27.66 38.88,28.04 IC3.7 38.75,28.17 37.86,29.06 37.86,29.69 38.24,30.07 39,30.07 | 40.02,27.66 40.4,28.04 IC3.10 | 39,30.07 39.13,30.07 39.26,29.95 39.26,29.69 IC3.3 | 39,30.07 40.53,31.6 43.19,31.6 C19.1 | 40.02,27.66 40.65,27.02 40.65,25.76 TP_3V3.TP 40.65,25.63 40.27,25.63 v39.51,24.87 | C25.1 29.28,33.31 30.49,33.38 30.75,33.12 IC9.E3 30.87,33.12 31.13,33.12 IC9.E2 31.26,33.12 31.26,33.25 32.14,34.14 34.3,34.14 C33.1 34.43,34.14 34.68,33.88 34.68,32.61 34.43,32.36 34.43,31.6 R17.1 34.3,31.47 34.3,26.14 33.92,25.76 R18.1 33.8,25.76 31.64,23.6 31.64,22.96 30.11,21.44 | 30.11,21.44 29.35,20.68 29.35,20.04 U1.P$A22 | v29.6,21.95 29.22,22.33 | 30.11,21.44 v30.24,21.31 | v40.78,11.91 40.78,13.05 40.65,13.18 40.65,13.94 J2.1 | v26.94,21.06 27.95,21.06 29.22,22.33 | 29.22,22.33 C12.1
  Bottom 0.127: v23.25,19.53 23.25,18.9 22.62,18.26 22.62,16.74 | v22.62,15.47 22.62,16.74 | v29.6,21.95 v30.24,21.31 30.49,21.06 38.88,21.06 | v40.78,11.91 40.78,16.48 41.8,17.5 41.8,18.14 38.88,21.06 | v39.51,24.87 39.51,21.69 38.88,21.06 | 22.62,16.74 23.51,16.74 24.65,17.88 24.65,18.77 v26.94,21.06
ALERT  (via drill 0.3)
  Top 0.127: v29.86,17.25 29.98,17.25 30.24,17.5 U1.P$J24 | v16.4,30.84 16.14,30.84 14.87,32.11 U3.5
  Route15 0.127: v22.62,25.88 21.22,25.88 16.4,30.71 v16.4,30.84
  Bottom 0.127: v29.86,17.25 29.86,19.41 26.94,22.33 26.94,23.72 27.32,24.1 27.32,24.36 25.79,25.88 v22.62,25.88
D+  (via drill 0.3)
  Top 0.127: v25.03,12.67 25.29,12.93 25.29,13.44 U1.P$AD6 | v10.43,28.68 10.68,28.68 12.21,30.2 12.46,30.2 D3.4
  Bottom 0.127: v25.03,12.67 25.03,12.17 25.29,11.91 25.29,11.66 22.75,9.12 13.09,9.12 10.43,11.79 10.43,24.61 9.66,25.37 9.66,27.91 v10.43,28.68
D-  (via drill 0.3)
  Top 0.127: v24.78,11.79 24.52,12.04 24.52,12.8 24.78,13.05 24.78,13.44 U1.P$AD4 | v10.43,25.25 10.43,26.26 12.46,28.3 D3.6
  Bottom 0.127: v24.78,11.79 20.97,11.79 18.55,9.37 13.22,9.37 10.68,11.91 10.68,24.99 v10.43,25.25
DEC1
  Top 0.127: U1.P$C1 23.76,19.02 21.86,19.02 20.59,20.29 19.95,20.29 C5.1
DEC3
  Top 0.127: U1.P$D23 29.86,18.77 30.11,18.77 31.38,20.04 32.02,20.04 C11.1
DEC4_6  (via drill 0.3)
  Top 0.127: U1.P$B5 25.03,19.53 25.03,21.44 24.27,22.2 L3.2 24.14,22.2 v23.51,22.2 | 26.43,22.45 26.43,23.21 C10.1 | v30.75,18.77 30.62,18.77 30.37,18.52 U1.P$E24 | C15.1 28.08,23.09 v27.45,22.45 26.43,22.45 | 26.43,22.45 C16.1
  Bottom 0.127: v30.75,18.77 30.75,19.15 27.57,22.33 | v23.51,22.2 23.51,24.36 22.11,25.76 22.11,26.01 22.49,26.39 25.67,26.39 27.57,24.48 27.57,22.33 | 27.57,22.33 v27.45,22.45
DN
  Top 0.127: 23,28.17 22.87,28.3 22.87,28.93 J4.A7 | 23,28.17 23.51,28.17 23.64,28.3 23.64,28.93 J4.B7 | 23,28.17 22.75,27.91 22.75,27.02 21.98,26.26 20.46,26.26 18.43,28.3 15.13,28.3 D3.1
DP
  Top 0.127: 22.36,29.69 22.36,29.06 J4.B6 | 22.36,29.69 22.49,29.82 23,29.82 23.13,29.69 23.13,29.06 J4.A6 | 22.36,29.69 21.22,30.84 18.3,30.84 17.79,30.33 15.13,30.33 D3.3
EPD_3V3  (via drill 0.3)
  Top 0.127: L5.2 5.73,7.59 6.74,7.59 C1-EP-DR.1 6.87,7.59 v7.89,8.61 | EPD_C5.2 13.47,20.17 13.47,19.91 11.19,17.63 11.19,16.48 11.06,16.36 10.68,16.36 J1.15 10.68,16.23 10.68,15.85 J1.16 10.55,15.72 10.17,15.72 v8.39,13.94 | v9.66,9.12 13.6,9.12 15.51,11.02 15.51,11.28 Q1.3
  Bottom 0.127: 7.89,9.12 7.89,13.44 v8.39,13.94 | 7.89,9.12 v7.89,8.61 | 7.89,9.12 v9.66,9.12
EPD_BUSY  (via drill 0.3)
  Top 0.127: v26.05,12.17 26.81,12.93 26.81,13.44 U1.P$AD12 | v9.92,19.15 10.55,19.15 J1.9
  Route15 0.127: v26.05,12.17 25.03,11.15 17.92,11.15 v9.92,19.15
EPD_CS  (1 unrouted)
EPD_DC  (via drill 0.3)
  Top 0.127: v26.05,13.05 26.05,13.18 26.3,13.44 U1.P$AD10 | v11.44,18.52 11.19,18.52 10.94,18.26 10.68,18.26 J1.11
  Route15 0.127: v26.05,13.05 25.54,13.05 25.29,13.31 24.27,13.31 23.76,12.8 21.98,12.8 16.27,18.52 v11.44,18.52
EPD_RST  (1 unrouted)
GDR  (via drill 0.3)
  Top 0.127: R2-EP-DR.2 8.27,3.4 7.38,3.4 7.25,3.28 Q3.1 7.12,3.28 7.12,5.05 7.38,5.31 v7.38,5.69 | v9.79,22.33 10.17,22.71 10.55,22.71 J1.2
  Bottom 0.127: v9.79,22.33 9.79,19.66 7.38,17.25 v7.38,5.69
GND  (via drill 0.3)
  Top 0.127: 3.95,2.13 2.68,3.4 SJ1.1 | 3.95,2.13 4.08,2.01 4.08,1.75 R_TYPE_SEL.1 | 7.12,1.75 6.74,2.13 3.95,2.13 | 7.12,1.75 7.25,1.62 8.9,1.62 C30.1 | 18.81,0.61 17.03,0.61 16.65,0.99 D4.1 16.52,1.12 13.86,3.78 13.47,3.78 SW_UP.1 13.35,3.91 13.35,4.16 11.7,5.82 9.92,5.82 v9.28,5.18 8.39,4.29 8.39,4.16 R2-EP-DR.1 | 18.81,0.61 19.95,0.61 C31.1 | v7.25,1.88 7.12,1.75 | 14.49,16.48 14.49,13.69 14.57,13.69 | 14.57,13.69 EPD_C9.1 14.48,13.73 14.49,16.48 | 14.49,16.48 EPD_C8.1 14.49,16.61 14.49,17.63 EPD_C7.1 14.49,17.75 14.49,18.9 EPD_C6.1 14.36,19.02 14.11,19.28 14.11,20.17 EPD_C5.1 14.11,20.29 | C8.2 19.95,23.09 19.44,22.58 19.44,20.42 C5.2 19.32,20.29 14.11,20.29 | EPD_C2.1 14.24,23.47 14.24,22.71 EPD_C1.1 14.11,22.58 14.11,21.06 13.73,20.68 | 13.73,20.68 13.22,20.68 12.33,19.79 10.68,19.79 J1.8 | 14.11,20.29 13.73,20.68 | 20.71,13.94 20.71,14.32 20.46,14.58 19.19,14.58 19.06,14.71 19.06,15.98 19.19,16.1 20.21,16.1 21.35,17.25 21.35,18.39 21.22,18.52 19.95,18.52 19.19,19.28 19.19,19.41 C17.1 | 20.71,13.94 20.33,13.56 C18.1 20.21,13.69 14.57,13.69 | 25.03,4.42 25.03,5.44 X1.2 25.03,5.56 24.02,6.58 23.76,6.58 X1.4 | 25.03,4.42 24.52,3.91 SW_ENT.1 | 23.64,10.01 25.16,10.01 C21.2 25.29,10.13 27.95,10.13 28.21,10.39 C7.2 28.33,10.52 29.98,10.52 C14.2 | 23.64,10.01 23.51,10.01 C20.2 | 23.64,10.01 23.64,6.71 X1.4 | 23.64,10.01 C20.2 | 20.71,13.94 22.49,12.17 22.49,10.77 23.38,9.88 C20.2 | 18.81,0.61 18.81,3.91 21.48,6.58 23.64,6.58 X1.4 | C22.2 30.37,8.23 30.37,7.34 C4.2 30.49,7.21 30.87,7.21 | 30.87,7.21 32.27,7.21 35.32,4.16 35.32,3.91 SW_DN.1 35.45,3.91 36.59,3.91 37.73,5.05 38.62,5.05
  Top 0.127: IC2.B3 40.14,4.67 40.4,4.67 41.29,5.56 42.69,5.56 C34.1 42.81,5.56 44.46,7.21 44.46,8.23 43.7,8.99 39,8.99 | J2.5 40.65,16.48 40.65,15.34 J2.3 40.53,15.21 40.14,15.21 39.51,14.58 39,14.58 38.62,14.2 38.62,13.69 39,13.31 39,11.15 | 38.62,5.05 39,4.67 IC2.B1 | 38.62,5.05 38.62,7.21 39,7.59 C32.1 39,7.72 39,8.99 | 39,8.99 39,11.15 | v37.73,1.24 37.1,0.61 C29.1 | 32.65,22.45 32.27,22.45 C2.2 | 32.65,22.45 33.16,22.45 C1.2 33.29,22.45 33.54,22.45 35.45,24.36 35.45,28.42 36.59,29.56 C24.1 36.72,29.69 37.61,30.58 37.61,31.47 | C9.2 32.52,16.74 32.52,17.12 32.4,17.25 32.4,18.26 32.65,18.52 C3.2 | 32.65,18.77 32.65,18.64 C3.2 | 32.65,18.77 32.65,19.15 | 32.65,19.15 32.65,20.04 C11.2 32.65,20.17 32.65,22.45 | 25.29,18.64 25.54,18.9 25.54,19.41 U1.P$B7 | 28.97,18.52 29.22,18.26 29.73,18.26 U1.P$F23 29.86,18.14 30.75,18.14 31.76,19.15 32.65,19.15 | 25.92,18.01 25.29,17.37 U1.P$79 25.29,17.25 25.29,16.23 U1.P$83 25.29,16.1 25.29,14.96 U1.P$87 | 25.29,18.64 U1.P$75 | 25.29,18.64 U1.P$74 | 27.57,14.96 26.56,14.96 U1.P$88 | U1.P$84 26.56,16.23 27.19,16.23 U1.P$74 | 27.57,14.96 U1.P$89 | 27.57,14.96 U1.P$74 | U1.P$85 27.57,16.1 27.32,15.85 U1.P$74 | U1.P$80 26.56,17.37 U1.P$74 | U1.P$81 27.7,17.37 U1.P$74 | 28.97,17.25 28.97,16.23 U1.P$86 28.97,16.1 28.97,14.96 U1.P$90 | 28.97,17.25 U1.P$82 | 28.97,17.25 U1.P$74 | 25.92,18.01 26.43,18.52 U1.P$76 | 25.92,18.01 U1.P$74 | U1.P$77 27.7,18.52 28.33,17.88 U1.P$74 | 28.97,18.52 U1.P$78 | 28.97,18.52 U1.P$74 | EPD_C10.1 EPD_C11.1 13.47,11.77 EPD_C12.1 13.47,10.77 v13.47,10.13 | 39,11.15 36.21,11.15 34.05,13.31 34.05,17.37 32.65,18.77 | 32.65,18.77 C3.2
  Top 0.127: 25.03,4.42 25.92,4.42 29.22,1.12 29.22,0.48 30.75,0.48 30.87,0.61 30.87,7.21 | C1-EP-DR.2 6.87,8.61 6.87,9.88 7.89,10.9 J1.MP2 8.01,11.02 8.01,12.93 8.39,13.31 | 8.39,13.31 10.3,15.21 10.55,15.21 J1.17 | J1.MP1 7.89,24.1 6.62,25.37 4.08,25.37 3.95,25.5 3.95,26.26 4.46,26.77 C38.2 4.59,26.9 4.59,28.04 C39.2 4.46,28.17 3.57,29.06 2.3,29.06 TP_BAT_GND.TP | 8.39,13.31 7.89,13.82 7.89,23.98 J1.MP1 | D3.2 15.13,29.44 18.55,29.44 J4.SH4 18.68,29.44 19.32,29.44 19.7,29.06 J4.A12_B1 19.82,28.93 19.82,27.91 21.22,26.52 21.73,26.52 21.98,26.77 21.98,26.9 R2_USB.2 | 13.73,32.74 13.86,32.87 U3.9 | 13.73,32.74 13.22,32.23 12.97,32.23 U3.4 12.84,32.23 12.46,32.23 10.94,33.76 | 13.73,32.74 14.24,32.74 | 14.24,32.74 14.74,32.74 U3.6 14.87,32.74 15.38,32.74 16.27,33.63 18.55,33.63 J4.SH2 18.68,33.76 27.32,33.76 J4.SH1 | 13.73,32.74 U3.9 | U3.1 12.97,33.63 13.22,33.63 13.86,32.99 U3.9 | IC1.D2 7.51,31.34 7.51,33.25 R9.1 7.51,33.38 7.76,33.63 8.9,33.63 9.03,33.5 C37.2 9.16,33.5 9.41,33.76 10.94,33.76 | 10.94,33.76 11.06,33.76 C27.1 | 14.62,29.44 15,29.44 D3.2 | 14.62,29.44 14.24,29.82 14.24,32.74 | 14.24,32.74 U3.9 | 23.13,25.25 23.13,26.52 | 23.13,26.52 23.13,26.9 R1_USB.1 | 23.13,25.25 21.22,23.34 C6.2 | C13.2 30.11,22.96 29.22,22.96 C12.2 29.1,22.83 28.84,22.83 28.21,22.2 C15.2 28.08,22.07 27.95,21.95 26.43,21.95 C16.2 26.3,21.82 25.92,22.2 25.92,23.47 | 25.92,23.47 26.18,23.72 26.3,23.72 C10.2 | 23.13,25.25 24.14,25.25 25.92,23.47 | TP_GND.TP 44.08,26.52 43.32,27.28 43.32,29.44 R3.1 43.32,29.56 43.45,29.56 43.7,29.82 43.7,30.71 43.32,31.09 C19.2 43.32,31.22 43.57,31.22 43.83,31.47 43.83,31.85 43.57,32.11 40.27,32.11 39.64,31.47 37.61,31.47
  Top 0.127: 37.61,31.47 37.61,31.98 35.45,34.14 C33.2 35.32,34.26 34.94,34.64 29.22,34.64 28.94,34.36 C25.2 28.1,34.01 27.7,34.01 27.45,33.76 J4.SH1 | IC9.B1 31.64,31.98 31.64,32.36 IC9.C1 31.51,32.36 31.26,32.36 IC9.C2 31.13,32.36 30.87,32.36 IC9.C3 30.75,32.36 28.84,32.36 28.71,32.49 28.6,32.49 C23.1 28.48,32.51 28.33,32.36 | 28.07,31.94 28.07,32.09 28.33,32.36 | C42.2 28.45,31.72 28.4,31.72 28.19,31.94 28.07,31.94 | 28.33,32.36 27.45,33.25 27.45,33.63 J4.SH1 | 39.38,28.17 39.76,28.17 IC3.9 | v39.38,28.68 39.38,28.17 | 39.38,28.17 IC3.8 | C43.2 27.64,29.56 27.45,29.56 J4.SH3 | J4.SH3 27.32,29.44 26.94,29.06 26.3,29.06 J4.A1_B12 26.18,28.93 26.18,28.55 24.14,26.52 23.13,26.52 | 28.07,31.94 27.66,31.94 26.94,31.22 26.94,29.95 27.32,29.56 J4.SH3 | 14.62,29.44 14.24,29.06 14.24,28.42 9.92,24.1 8.01,24.1 J1.MP1 | 14.62,29.44 D3.2
  Bottom 0.127: v7.25,1.88 9.54,4.16 9.54,4.93 v9.28,5.18 | v37.73,1.24 37.73,2.01 33.8,5.94 31.38,5.94 28.97,8.36 28.97,14.83 U1.P$90 | v13.47,10.13 18.55,10.13 24.52,16.1 25.16,16.1 U1.P$83 | v39.38,28.68 28.21,28.68 27.45,29.44 J4.SH3
HAPTIC_EN  (via drill 0.3)
  Top 0.127: v21.86,15.98 22.75,15.98 23.25,15.47 23.76,15.47 U1.P$U1 | v39.13,5.69 39.13,5.18 IC2.A1
  Route15 0.127: v15.76,10.64 15.76,8.61 17.29,7.09 17.29,4.29 17.41,4.16 18.81,4.16 19.57,4.93 38.24,4.93 39,5.69 v39.13,5.69
  Bottom 0.127: v21.86,15.98 21.09,15.98 v15.76,10.64
IMU_INT1  (via drill 0.3)
  Top 0.127: v23.13,18.14 22.87,17.88 22.87,17.12 23.51,16.48 23.76,16.48 U1.P$N1 | v38.37,29.56 38.75,29.18 IC3.5
  Route15 0.127: v23.13,18.14 26.81,21.82 28.59,21.82 36.34,29.56 v38.37,29.56
IMU_INT2  (1 unrouted)
LX1
  Top 0.127: IC9.B2 31.13,31.98 30.87,31.98 IC9.B3 30.75,31.85 30.62,31.85 30.37,31.6 30.37,28.8 30.75,28.42 L7.1
LX2  (via drill 0.3)
  Top 0.127: IC9.D2 31.13,32.74 30.87,32.74 IC9.D3 30.75,32.74 30.37,32.74 v30.24,32.87 | v32.4,30.71 32.4,28.8 32.78,28.42 L7.2
  Bottom 0.127: v32.4,30.71 v30.24,32.87
MOSI  (1 unrouted)
N$1
  Top 0.127: IC1.D1 7.89,31.34 7.89,33.25 R9.2
N$2
  Top 0.127: U1.P$D2 24.27,18.64 21.86,18.64 20.59,19.91 18.94,19.91 18.81,19.79 18.81,19.15 20.08,17.88 X2.2 20.08,17.75 18.81,16.48 18.81,14.58 19.19,14.2 20.21,14.2 C18.2
N$3  (via drill 0.3)
  Top 0.127: v31.76,21.56 30.37,20.17 30.37,19.53 U1.P$B24 | v32.78,23.34 33.16,22.96 C1.1 | v22.75,5.56 23.64,5.56 X1.1
  Route15 0.127: v22.75,5.56 23,5.56 26.43,8.99 26.81,8.99 27.32,9.5 27.32,9.63 29.98,12.29 30.37,12.29 31.76,13.69 v31.76,21.56
  Bottom 0.127: v31.76,21.56 31.76,22.33 v32.78,23.34
N$4  (via drill 0.3)
  Top 0.127: C2.1 32.14,22.83 31.89,22.83 31.64,22.58 31.64,22.07 29.86,20.29 29.86,20.04 U1.P$A23 29.86,19.91 29.48,19.53 v29.1,19.53 | v26.56,9.63 25.16,8.23 25.16,6.71 X1.3
  Route15 0.127: v26.56,9.63 26.56,10.9 27.06,11.4 27.06,18.9 27.7,19.53 v29.1,19.53
N$5  (1 unrouted)
  Top 0.127: C17.2 19.7,19.41 20.71,19.41 21.6,18.52 21.6,16.74 20.21,15.34 X2.1
N$6
  Top 0.127: L3.1 24.14,23.34 22.75,23.34 L2.2
N$7
  Top 0.127: U1.P$B3 24.52,19.53 24.52,20.55 22.75,22.33 L2.1
N$8
  Top 0.127: U1.P$N24 30.37,16.48 31.89,16.48 32.02,16.61 C9.1
N$9
  Top 0.127: U1.P$A18 28.33,20.04 30.11,21.82 30.11,22.33 C13.1
N$10
  Top 0.127: U1.P$H23 29.86,17.75 30.11,17.75 30.24,17.88 31.64,17.88 31.76,17.75 L1.1 31.89,17.75 32.02,17.88 32.02,18.52 C3.1
N$11
  Top 0.127: U1.P$AC5 25.03,13.94 24.52,13.94 24.4,13.82 23.76,13.82 23.64,13.94 23.38,13.94 23,13.56 23,11.4 23.38,11.02 C20.1
N$12
  Top 0.127: IC2.A2 39.64,5.18 39.64,7.34 39.89,7.59 C32.2
N$13
  Top 0.127: IC3.1 40.4,29.69 42.81,29.69 43.19,30.07 R3.2
N$14  (via drill 0.3)
  Top 0.127: D5.2 8.52,6.96 8.01,6.96 6.62,5.56 6.62,4.67 C2-EP-DR.2 6.49,4.55 6.11,4.16 v5.6,4.16 5.35,4.16 4.84,4.67 4.08,4.67 1.16,7.59 L5.1 | v5.86,0.99 5.98,1.12 6.49,1.12 Q3.3
  Bottom 0.127: v5.86,0.99 5.22,0.99 4.71,1.5 4.71,3.28 v5.6,4.16
N$15
  Top 0.127: 16.14,4.93 16.52,4.55 D4.2 | 16.14,4.93 15,6.07 9.54,6.07 8.14,4.67 7.63,4.67 C2-EP-DR.1 | 16.14,4.93 18.05,6.83 D2.1
N$16
  Top 0.127: IC9.E1 31.64,33.12 33.54,33.12 33.8,32.87 R2.2
N$17
  Top 0.127: R1_USB.2 23.76,27.02 23.76,27.91 24.14,28.3 24.14,28.93 J4.A5
N$18
  Top 0.127: IC9.D1 31.64,32.74 32.02,32.74 32.52,32.23 R4.2
N$20
  Top 0.127: EPD_C2.2 13.09,23.47 12.71,23.47 11.06,21.82 10.68,21.82 J1.4
N$22  (via drill 0.3)
  Top 0.127: v5.22,1.62 4.71,1.62 R_TYPE_SEL.2 | v5.22,2.64 4.33,3.53 SJ1.2 | v9.03,4.29 9.03,3.78 R1-EP-DR.1
  Bottom 0.127: v5.22,1.62 v5.22,2.64 6.87,4.29 v9.03,4.29
N$23
  Top 0.127: EPD_C1.2 13.09,22.58 12.33,22.58 11.06,21.31 10.68,21.31 J1.5
N$24
  Top 0.127: R2_USB.1 21.35,27.02 21.35,28.93 J4.B5
N$29
  Top 0.127: EPD_C6.2 13.35,18.9 13.35,18.52 11.44,16.61 11.44,15.21 11.06,14.83 10.68,14.83 J1.18
N$31
  Top 0.127: EPD_C7.2 13.35,17.63 13.35,17.25 11.7,15.6 11.7,14.96 11.06,14.32 10.68,14.32 J1.19
N$32
  Top 0.127: EPD_C8.2 13.35,16.48 13.35,16.1 11.06,13.82 10.68,13.82 J1.20
N$34
  Top 0.127: EPD_C10.2 13.98,13.28 13.98,14.15 13.79,14.34 13.23,14.34 12.33,13.44 12.33,13.18 11.95,12.8 10.68,12.8 J1.22
N$36
  Top 0.127: EPD_C12.2 14.36,10.77 14.36,10.39 13.6,9.63 12.71,9.63 10.68,11.66 J1.24
OUT+
  Top 0.127: IC2.A3 40.14,5.18 40.53,5.18 43.07,7.72 TP1.TP
OUT-
  Top 0.127: IC2.C3 40.14,4.16 41.03,4.16 42.43,2.77 TP2.TP
P0.13  (via drill 0.3)
  Top 0.127: v26.05,11.28 25.54,11.79 25.54,13.18 25.79,13.44 U1.P$AD8 | v12.71,3.02 11.32,3.02 10.55,3.78 | 10.55,3.78 10.05,3.78 9.41,3.15 9.41,3.02 9.28,2.89 9.28,2.39 R5.1 | 10.55,3.78 SW_UP.2 | v8.27,1.12 8.39,1.12 8.9,0.61 C30.2
  Bottom 0.127: v26.05,11.28 26.05,9.5 22.24,5.69 22.24,5.56 19.95,3.28 12.97,3.28 v12.71,3.02 12.46,3.28 9.54,3.28 9.41,3.15 9.41,2.77 8.27,1.62 v8.27,1.12
P0.14  (via drill 0.3)
  Top 0.127: C31.2 20.08,1.62 20.08,2.39 R8.1 20.08,2.51 20.08,2.77 21.09,3.78 21.48,3.78 SW_ENT.2 21.6,3.91 21.73,4.04 v21.73,5.69 | v25.54,13.94 26.05,13.94 U1.P$AC9
  Bottom 0.127: v25.54,13.94 25.54,9.5 v21.73,5.69
P1.01  (via drill 0.3)
  Top 0.127: v29.86,14.2 29.86,14.71 U1.P$Y23 | v20.84,13.05 20.21,13.05 17.79,10.64 | 17.79,10.64 17.67,10.52 Q1.1 17.79,10.64 | 17.79,10.64 17.41,11.02 R_PWR_EPD.1
  Bottom 0.127: v29.86,14.2 29.86,16.1 29.22,16.74 24.52,16.74 v20.84,13.05
P1.02  (via drill 0.3)
  Top 0.127: C29.2 37.1,1.62 37.1,2.39 R7.1 37.22,2.51 37.22,3.91 v37.48,4.16 | v30.87,15.34 30.75,15.34 30.37,14.96 U1.P$W24 | v31.51,6.45 31.51,4.93 32.52,3.91 SW_DN.2
  Bottom 0.127: v30.87,15.34 30.87,15.09 30.37,14.58 30.37,14.32 31.51,13.18 v31.51,6.45 33.67,6.45 35.95,4.16 v37.48,4.16
PMIC_INT  (via drill 0.3)
  Top 0.127: v24.27,15.21 24.27,15.72 U1.P$T2 | v10.17,27.79 7.89,30.07 IC1.A1
  Bottom 0.127: v24.27,15.21 24.02,15.21 18.43,9.63 13.35,9.63 10.94,12.04 10.94,27.02 v10.17,27.79
PREVGH  (via drill 0.3)
  Top 0.127: v12.84,13.31 13.05,13.31 EPD_C9.2 | v11.82,13.31 10.68,13.31 J1.21 10.55,13.18 10.17,13.18 8.9,11.91 8.9,8.86 10.68,7.09 11.95,7.09 D5.1
  Bottom 0.127: v11.82,13.31 v12.84,13.31
PREVGL
  Top 0.127: EPD_C11.2 14.49,11.79 14.74,11.79 15,12.04 16.14,12.04 16.27,11.91 16.27,8.61 14.62,6.96 D2.2 14.49,6.96 13.86,7.59 10.55,7.59 9.16,8.99 9.16,11.15 10.17,12.17 10.55,12.17 J1.23
RESE  (via drill 0.3)
  Top 0.127: Q3.2 5.98,3.15 6.62,2.51 7.76,2.51 8.39,3.15 8.9,3.15 R1-EP-DR.2 9.03,3.15 9.41,3.53 9.41,3.78 10.17,4.55 v10.17,5.31 | v9.41,18.39 9.41,21.31 10.3,22.2 10.55,22.2 J1.3
  Bottom 0.127: v9.41,18.39 9.41,10.01 10.17,9.24 v10.17,5.31
RESET  (1 unrouted)
  Top 0.127: J2.6 39.26,16.61 38.88,16.61 37.99,17.5 37.99,22.33 TP_RESET.TP
RF
  Top 0.127: L1.2 32.91,17.63 32.91,17.12 33.8,16.23 33.8,12.42 29.98,8.61 29.98,8.36 C22.1 29.86,8.23 29.86,7.34 C4.1 29.98,7.21 29.98,1.62 ANT1.1
SCK
  Top 0.127: U1.P$A12 26.81,20.04 26.81,20.55 24.65,22.71 23.13,22.71 23,22.83 20.84,22.83 20.59,23.09 20.59,23.21 19.7,24.1 10.68,24.1 8.9,22.33 8.9,18.26 9.79,17.37 10.55,17.37 J1.13
SCL  (via drill 0.3)  (1 unrouted)
  Top 0.127: R17.2 33.8,31.6 33.29,32.11 R4.1 33.16,32.11 32.02,30.96 v31.51,30.96 | v9.03,30.33 8.9,30.45 8.01,30.45 IC1.B1 | v15.63,33.63 15.25,33.25 14.87,33.25 U3.7 | v38.62,4.42 38.75,4.42 39,4.16 IC2.C1 | v35.83,13.94 35.83,24.74 36.72,25.63 TP_SCL.TP 36.84,25.63 38.11,24.36 41.16,24.36 41.92,25.12 41.92,27.79 40.65,29.06 40.53,29.06 IC3.12
  Bottom 0.127: v9.03,30.33 9.03,30.71 12.97,34.64 14.62,34.64 v15.63,33.63 16.78,32.49 25.16,32.49 | v31.51,30.96 28.21,30.96 26.68,32.49 25.16,32.49 | v38.62,4.42 38.62,9.37 35.83,12.17 v35.83,13.94 34.05,13.94 32.27,15.72 32.27,18.01 29.1,21.18 29.1,23.34 25.16,27.28 25.16,32.49
SDA  (via drill 0.3)  (1 unrouted)
  Top 0.127: v23.38,17.25 23.51,17.25 23.76,16.99 U1.P$L1 | v26.81,24.23 31.76,24.23 33.8,26.26 R18.2 33.8,26.39 v33.8,30.84 | v9.79,30.84 8.01,30.84 IC1.C1 | v33.8,32.23 34.3,32.74 R2.1 | v39.89,30.33 39.89,29.69 IC3.2 | v14.24,34.14 14.36,34.14 14.74,33.76 U3.8 | v39.26,31.98 39.76,32.49 39.76,33.12 TP_SDA.TP
  Bottom 0.127: v23.38,17.25 23.38,17.75 24.4,18.77 24.4,21.69 | 24.4,21.69 24.4,21.82 v26.81,24.23 | 13.09,30.84 v9.79,30.84 | 13.09,30.84 22.24,21.69 24.4,21.69 | v33.8,32.23 v33.8,30.84 34.3,30.33 39.26,30.33 | 39.26,30.33 v39.89,30.33 | v14.24,34.14 14.24,31.98 13.09,30.84 | 39.26,30.33 v39.26,31.98
SWDCLK  (via drill 0.3)
  Top 0.127: v30.87,14.45 30.37,14.45 U1.P$AA24 | v34.56,13.44 35.95,13.44 36.84,14.32 38.37,14.32 39.26,15.21 J2.4 39.38,15.34 39.89,15.85 39.89,18.9 40.91,19.91 40.91,22.2 TP_SWDCLK.TP
  Bottom 0.127: v30.87,14.45 33.16,14.45 34.18,13.44 v34.56,13.44
SWDIO  (via drill 0.3)
  Top 0.127: v32.78,15.85 31.38,14.45 31.38,14.32 31,13.94 30.37,13.94 U1.P$AC24 | 41.16,19.53 43.83,22.2 TP_SWDIO.TP | 41.16,19.53 v40.4,18.77 | 41.16,19.53 44.08,16.61 44.08,15.34 43.07,14.32 41.92,14.32 41.67,14.58 40.27,14.58 39.76,14.07 39.38,14.07 J2.2
  Bottom 0.127: v32.78,15.85 35.19,15.85 38.11,18.77 v40.4,18.77
SWO  (via drill 0.3)
  Top 0.127: v29.86,12.93 29.35,13.44 U1.P$AD22 | v30.62,13.44 32.02,13.44 32.4,13.82 TP_SWO.TP
  Bottom 0.127: v29.86,12.93 30.11,12.93 v30.62,13.44
VBAT
  Top 0.127: U3.3 12.97,32.74 12.97,33.12 U3.2 12.84,33.25 12.21,33.25 11.32,34.14 11.06,34.14 C27.2 11.06,34.26 9.28,34.26 9.16,34.39 C37.1 9.03,34.39 8.01,34.39 7.12,33.5 7.12,30.96 | 7.12,30.96 5.35,30.96 4.2,32.11 TP_VBAT.TP | 7.12,30.96 7.51,30.96 IC1.C2
VBUS  (via drill 0.3)
  Top 0.127: 7.51,28.8 7.51,30.07 IC1.A2 | 7.51,28.8 4.59,25.88 C38.1 | 7.51,28.8 9.03,27.28 10.3,27.28 11.95,28.93 12.08,28.93 12.46,29.31 D3.5 12.59,29.44 12.97,29.44 13.73,30.2 v13.73,30.84 | 24.27,13.44 24.27,11.66 24.91,11.02 25.16,11.02 C21.1 | C43.1 28.59,30.45 28.59,31.21 C42.1 28.5,31.22 27.57,31.22 v27.45,31.09 | v26.43,31.09 26.05,31.09 25.16,30.2 25.16,29.95 | 25.16,29.95 25.16,29.18 25.29,29.06 J4.A4_B9 | v21.22,29.95 20.71,29.44 20.71,29.06 J4.A9_B4 | 25.16,29.95 v23.51,29.95 | v23.51,13.44 24.27,13.44 | 24.27,13.44 U1.P$AD2
  Route15 0.127: v23.51,13.44 23.51,16.23 22.49,17.25 22.49,24.87 23.51,25.88 v23.51,29.95
  Bottom 0.127: v26.43,31.09 v27.45,31.09 | v23.51,29.95 v21.22,29.95 19.82,31.34 16.27,31.34 15.76,30.84 v13.73,30.84
VREG  (via drill 0.3)
  Top 0.127: 35.83,30.84 36.21,31.22 TP_VREG.TP 35.83,30.84 | 35.83,30.84 35.7,30.71 35.7,29.69 C24.2 | IC1.B2 7.51,30.45 v7,30.45 5.86,30.45 4.59,29.18 C39.1 | IC9.A1 31.51,31.6 31.26,31.6 IC9.A2 31.13,31.6 30.87,31.6 IC9.A3 30.75,31.47 30.75,31.09 31.64,30.2 31.64,27.28 31.38,27.02 30.11,27.02 29.86,27.28 29.86,31.11 v29.25,31.72 29.09,31.72 28.83,31.98 28.62,31.98 C23.2 | v34.94,31.72 35.83,30.84
  Route15 0.127: v7,30.45 8.27,30.45 9.54,31.72 v29.25,31.72
  Bottom 0.127: v34.94,31.72 33.29,33.38 30.11,33.38 29.25,32.51 v29.25,31.72